# Allegro board BBB_CAPE_PCB_AN_V_1_1.brd
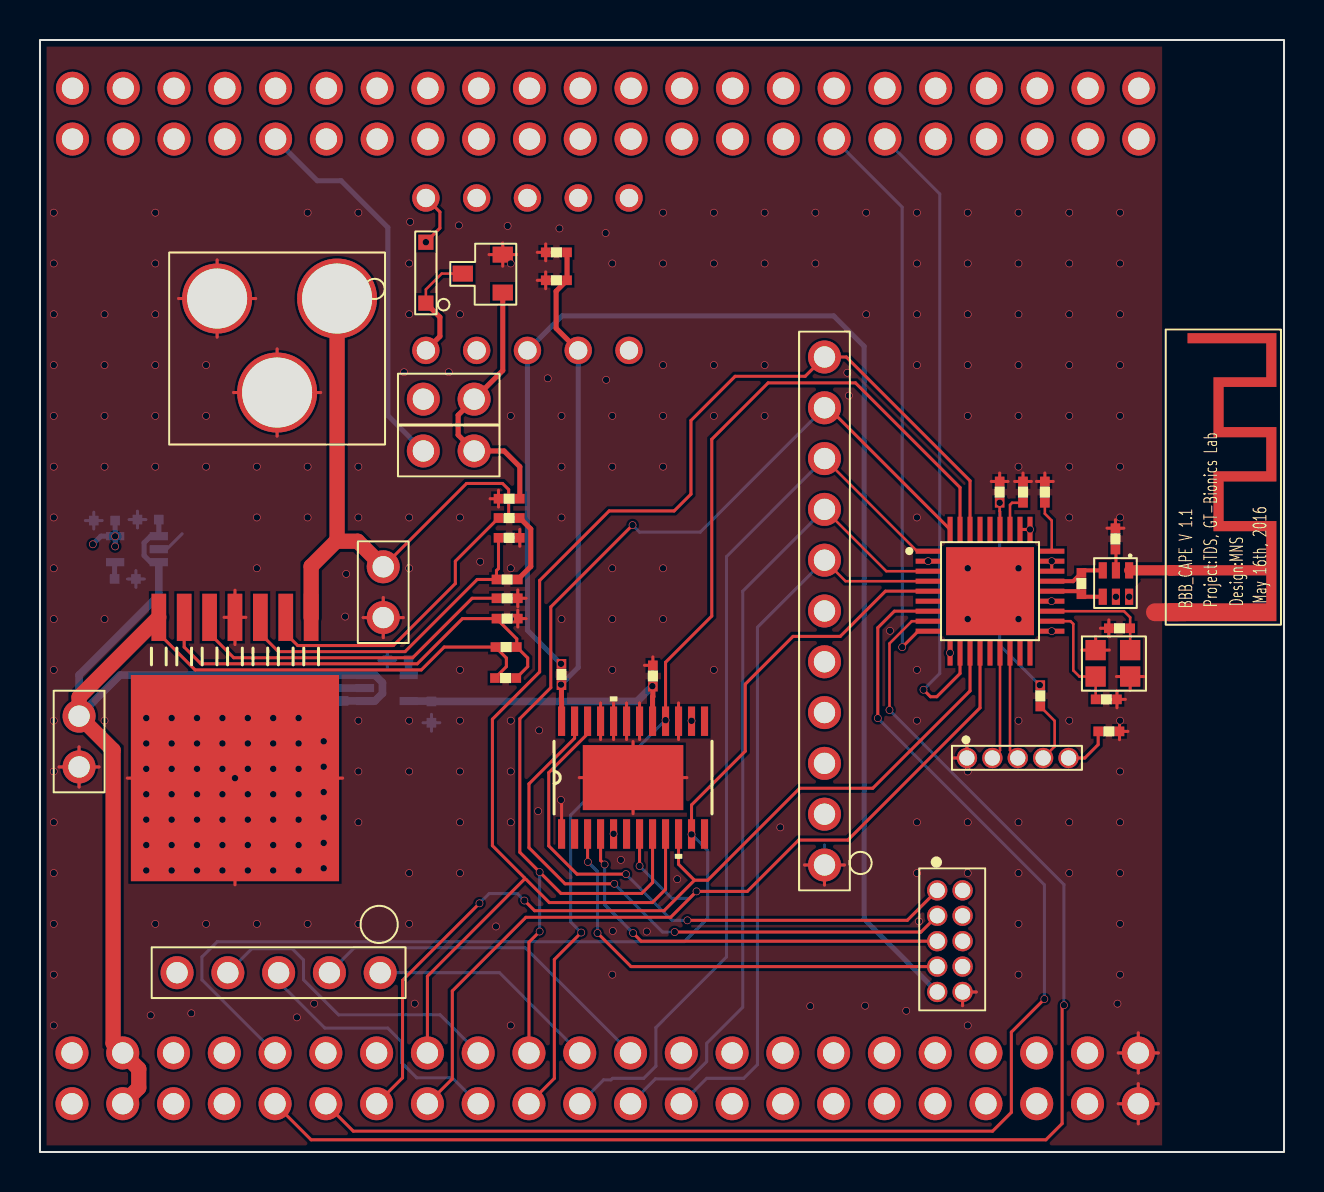
[diagram p0: board, top side]
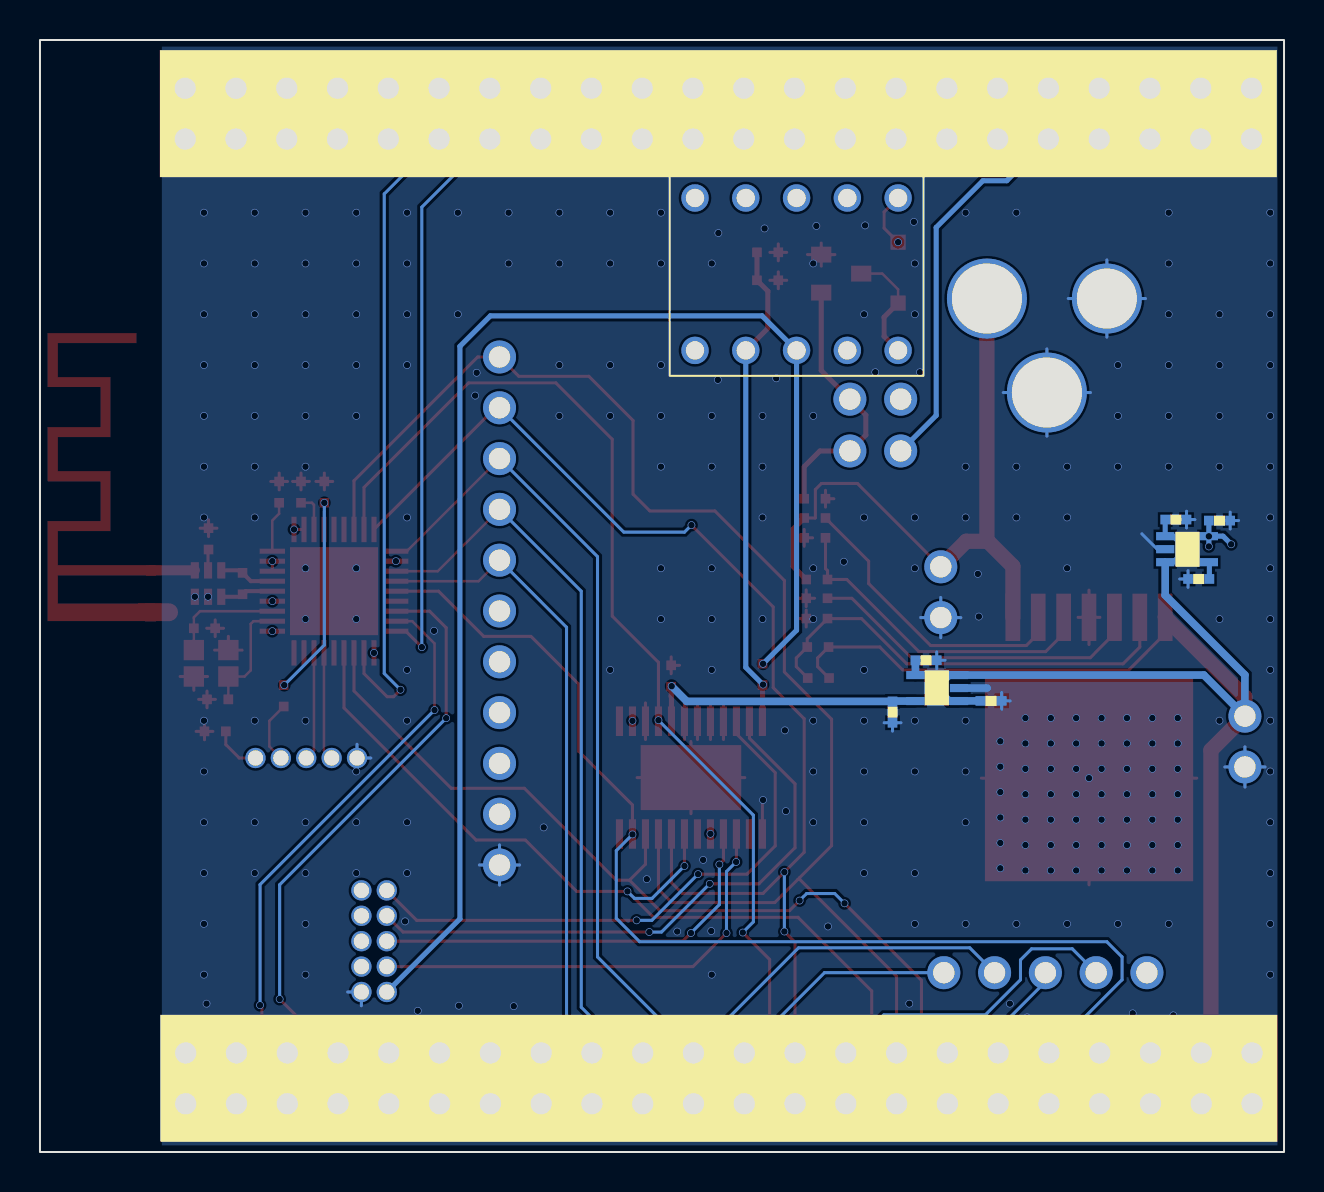
[diagram p1: board, bottom side, seen from below]

Outline 62.23 x 55.6 mm; copper layers: TOP, GND, MID, BOTTOM. Coordinates in mm from the lower left corner of the outline.
Outline path: rectangle 0,0 62.23,55.6

## Design rules (mm)
net group RF: nets RF+ RF-
nets with their own width: min track width 0.152; nets +12V FWD GND L N11227503 N11227519 N11227575 N11227777 N11228765 N11229371 N11229427 N11229455 N11229491 NCLR NLDAC NSYNC R RESET_N RVR SPI_MISO SPI_MOSI SPI_SCK VCC3V VCC5V

## Placement (name value [footprint] x y rotation side)
C1  10uF  [JUMPER2]  15.9 30.53 270 top
C2  0.022uF  [C0402]  24.33 28.37 180 top
C3  100uF  [JUMPER2]  3.23 17.98 90 top
C4  0.022uF  [C0402]  22.35 24.56 0 top
C6  1nF  [C0402]  48.69 32.03 90 top
C11  1uF  [C0402]  52.5 20.35 0 top
C12  1uF  [C0402]  49.86 32.03 90 top
C13  22pF  [C0402]  54.97 26.87 180 top
C14  22pF  [C0402]  52.37 21.95 0 top
C15  1uF  [C0402]  15.62 21.87 180 bottom
C41  10uF  [C0402]  26.8 45.67 180 top
C42  0.1uF  [C0402]  26.8 44.27 180 top
C45  100nF  [C0402]  29.97 24.76 270 top
C46  22pF  [C0402]  54.48 29.69 90 top
C47  1uF  [C0402]  20.27 22.96 270 bottom
C48  10nF  [C0402]  18.87 23.9 180 bottom
C49  1uF  [C0402]  4.19 30.89 180 bottom
C50  10nF  [C0402]  3.3 29.34 0 bottom
C51  1uF  [C0402]  6.38 30.94 180 bottom
D1  MBR0520L  [DIODED]  19.84 41.88 90 top
H9  851-87-005-10-001101  [H5X1_DEB]  48.92 19.71 0 top
H13  Header1X1  [ANT_W]  57.63 32.97 0 top
H14  HDISP  [DISP_HEADER]  40.51 13.08 90 top
J3  CON5  [H4X2]  44.88 13.08 270 top
L1  10nH  [L0402]  52.43 27.56 90 top
Q2  DMN5L06K  [MOS_DMN]  23.83 42.37 90 top
R2  100k  [R0402]  24.33 32.03 180 top
R3  5.62k  [R0402]  24.16 24.03 180 top
R4  1.07k  [R0402]  22.5 26.34 0 top
R5  56k  [R0402]  50.6 32.13 90 top
R57  100k  [R0402]  22.61 32.33 0 top
R58  0  [JUMPER2]  17.91 33.78 0 top
R59  0  [JUMPER2]  22.99 38.91 180 top
R60  2.7k  [R0402]  50.37 21.95 90 top
R61  0  [R0402]  26.42 23.01 90 top
RENB  11.8k  [R0402]  24.33 31.04 180 top
RENT  68.1k  [R0402]  22.5 28.3 0 top
U2  TPS71725  [TPS71730]  15.67 22.2 90 bottom
U6  PJack  [BARRELCON]  11.86 37.97 180 top
U7  1  [CC2510]  47.52 28.04 0 top
U9  P8  [CONNECT22X2]  56.24 55.09 270 bottom
U10  P9  [CONNECT22X2]  56.21 6.86 270 bottom
U11  Value  [AD5724]  29.67 18.72 90 top
U13  Value  [LMZ14203]  9.75 18.69 180 top
U14  relay  [MBR0520L]  18.03 48.97 0 bottom
U15  balunn  [BALUNN]  52.73 27.2 0 top
U16  TPS71733  [TPS71730]  6.53 31.14 270 bottom
U17  H_UART  [UART_HEADER]  18.29 10.24 180 top
Y1  26MHz  [CRYST_26M]  55.32 25.98 180 top

## Library data of the parts
C1-C4 C11-C14 C41 C42 C45 = C
C6 C15 C46 C48 C50 C51 = C: room: 1
C47 C49 = C: room: 2
D1 = 1N5814
H9 = H5X1_Debug
H13 = Header1X1_0: room: 1
H14 = HDISP
J3 = CON5_0
L1 = INDUCTOR
Q2 = DMN5L06K_0: room: 2
R2-R4 R57-R59 = R_0
R5 RENB RENT = R
R60 R61 = R: room: 1
U2 U16 = TPS71730_0: room: 1
U6 = PJack_0
U7 = cc2510f32rspr_1
U9 U10 = connect22x2
U11 = AD5724AREZ
U13 = LMZ14203_NDW_7
U14 = relay
U15 = balunn
U17 = H_UART
Y1 = CRYSTAL_2

## Footprints (pads in the part's own frame, mm; a bottom-side part is the same pattern mirrored in y, then rotated)
AD5724
  rect 1.473x0.356 smd: 1(-2.819,3.575) 2(-2.819,2.925) 3(-2.819,2.275) 4(-2.819,1.625) 5(-2.819,0.975) 6(-2.819,0.325) 7(-2.819,-0.325) 8(-2.819,-0.975) 9(-2.819,-1.625) 10(-2.819,-2.275) 11(-2.819,-2.925) 12(-2.819,-3.575) 13(2.819,-3.575) 14(2.819,-2.925) 15(2.819,-2.275) 16(2.819,-1.625) 17(2.819,-0.975) 18(2.819,-0.325) 19(2.819,0.325) 20(2.819,0.975) 21(2.819,1.625) 22(2.819,2.275) 23(2.819,2.925) 24(2.819,3.575)
  rect 3.251x5.029 smd: 25(0,0)
ANT_W
  rect 0.508x0.508 smd: 1(-0.94,-3.886)
  rect 0.889x0.889 smd: 2(-0.749,-5.982)
BALUNN
  rect 0.406x0.813 smd: 1(1.753,1.88) 2(1.092,1.88) 3(0.432,1.88) 4(0.432,0.559) 5(1.092,0.559) 6(1.753,0.559)
BARRELCON
  round 4 hole 3.5: 1(-3,-4.7) 3(0,0)
  round 3.5 hole 3: 2(3,-4.7)
C0402
  rect 0.483x0.483 smd: 1(0.432,0.686) 2(1.499,0.686)
CC2510
  rect 1.27x0.254 smd: 1(-3.086,2) 2(-3.086,1.5) 3(-3.086,1) 4(-3.086,0.5) 5(-3.086,0) 6(-3.086,-0.5) 7(-3.086,-1) 8(-3.086,-1.5) 9(-3.086,-2) 19(3.086,-2) 20(3.086,-1.5) 21(3.086,-1) 22(3.086,-0.5) 23(3.086,0) 24(3.086,0.5) 25(3.086,1) 26(3.086,1.5) 27(3.086,2)
  rect 0.254x1.27 smd: 10(-2,-3.086) 11(-1.5,-3.086) 12(-1,-3.086) 13(-0.5,-3.086) 14(0,-3.086) 15(0.5,-3.086) 16(1,-3.086) 17(1.5,-3.086) 18(2,-3.086) 28(2,3.086) 29(1.5,3.086) 30(1,3.086) 31(0.5,3.086) 32(0,3.086) 33(-0.5,3.086) 34(-1,3.086) 35(-1.5,3.086) 36(-2,3.086)
  rect 4.4x4.4 smd: 37(0,0)
CONNECT22X2
  round 1.651 hole 1.067: 1(4.445,54.61) 2(1.905,54.61) 3(4.445,52.07) 4(1.905,52.07) 5(4.445,49.53) 6(1.905,49.53) 7(4.445,46.99) 8(1.905,46.99) 9(4.445,44.45) 10(1.905,44.45) 11(4.445,41.91) 12(1.905,41.91) 13(4.445,39.37) 14(1.905,39.37) 15(4.445,36.83) 16(1.905,36.83) 17(4.445,34.29) 18(1.905,34.29) 19(4.445,31.75) 20(1.905,31.75) 21(4.445,29.21) 22(1.905,29.21) 23(4.445,26.67) 24(1.905,26.67) 25(4.445,24.13) 26(1.905,24.13) 27(4.445,21.59) 28(1.905,21.59) 29(4.445,19.05) 30(1.905,19.05) 31(4.445,16.51) 32(1.905,16.51) 33(4.445,13.97) 34(1.905,13.97) 35(4.445,11.43) 36(1.905,11.43) 37(4.445,8.89) 38(1.905,8.89) 39(4.445,6.35) 40(1.905,6.35) 41(4.445,3.81) 42(1.905,3.81) 43(4.445,1.27) 44(1.905,1.27)
CRYST_26M
  rect 1.016x1.016 smd: 1(0.787,0.889) 2(2.515,2.21) 3(2.515,0.889) 4(0.787,2.21)
DIODED
  rect 0.762x0.762 smd: 1(0.559,0.533) 2(3.607,0.533)
DISP_HEADER
  round 1.651 hole 1.067: 1(1.27,1.27) 2(3.81,1.27) 3(6.35,1.27) 4(8.89,1.27) 5(11.43,1.27) 6(13.97,1.27) 7(16.51,1.27) 8(19.05,1.27) 9(21.59,1.27) 10(24.13,1.27) 11(26.67,1.27)
H4X2
  round 1.016 hole 0.762: 1(0,0) 2(0,1.27) 3(1.27,0) 4(1.27,1.27) 5(2.54,0) 6(2.54,1.27) 7(3.81,0) 8(3.81,1.27) 9(5.08,0) 10(5.08,1.27)
H5X1_DEB
  round 1.016 hole 0.762: 1(-2.55,-0.01) 2(-1.28,-0.01) 3(-0.01,-0.01) 4(1.26,-0.01) 5(2.53,-0.01)
JUMPER2
  round 1.651 hole 1.067: 1(1.27,1.27) 2(3.81,1.27)
L0402
  rect 0.483x0.483 smd: 1(0.33,0.33) 2(1.397,0.33)
LMZ14203
  rect 0.737x2.362 smd: 1(-3.81,-8.039) 2(-2.54,-8.039) 3(-1.27,-8.039) 4(0,-8.039) 5(1.27,-8.039) 6(2.54,-8.039) 7(3.81,-8.039)
  rect 10.414x10.312 smd: 8(0,0)
MBR0520L
  round 1.372 hole 0.914: 1(1.27,1.27) 2(3.81,1.27) 3(6.35,1.27) 4(8.89,1.27) 5(11.43,1.27) 6(11.43,8.89) 7(8.89,8.89) 8(6.35,8.89) 9(3.81,8.89) 10(1.27,8.89)
MOS_DMN
  rect 0.8x1.016 smd: 1(0.605,0.676) 2(2.504,0.676) 3(1.554,2.676)
R0402
  rect 0.483x0.483 smd: 1(0.33,0.33) 2(1.397,0.33)
TPS71730
  rect 0.406x0.914 smd: 1(0.349,0.584) 2(0.999,0.584) 3(1.649,0.584) 4(1.649,2.769) 5(0.349,2.769)
UART_HEADER
  round 1.651 hole 1.067: 1(1.27,1.27) 2(3.81,1.27) 3(6.35,1.27) 4(8.89,1.27) 5(11.43,1.27)

## Nets
+12V: J3.9 R61.2 U14.8
AVDD: C41.1 C42.1 R61.1 U11.24(AVDD) U14.7
GND: C1.2 C2.1 C3.1 C6.2 C11.2 C12.2 C13.2 C14.2 C15.2 C41.2 C42.2 C45.1 C46.2 C47.2 C48.2 C49.2 C50.2 C51.2 H9.1(GND) H13.2 H14.1(GND) J3.10 Q2.2(S) R4.2 R5.2 R57.1 RENB.1 U2.2(GND) U6.2(GND) U6.3 U7.37(GND EXPOSED) U10.43 U10.44 U11.1(AVSS) U11.15(GND) U11.18(DAC_GND_1) U11.19(DAC_GND) U11.20(SIG_GND_1) U11.21(SIG_GND) U11.25(AVSS_1) U13.4(GND) U13.8 U15.5(GND2) U15.6(GND3) U16.2(GND) Y1.3(GND#3) Y1.4(GND#4)
VCC2P5V: C45.2 C47.1 U2.5(OUT) U11.17(REFIN)
VCC3V: C11.1 C49.1 D1.2(K) H9.5(VCC) H14.3(VCC3V) R59.2 U7.2(DVDD#2) U7.10(DVDD#10) U7.19(AVDD#19) U7.22(AVDD#22) U7.25(AVDD#25) U7.26(AVDD#26) U7.28(GUARD) U7.29(AVDD_DREG) U10.1 U10.2 U11.5(BIN/ 2SCOMP) U11.14(DVCC) U14.1 U16.5(OUT)
VCC5V: C3.2 C4.1 C15.1 C51.1 R3.2 U2.1(IN) U2.3(EN) U10.3 U10.4 U13.7(VOUT) U16.1(IN) U16.3(EN)
DC: H9.3(DC) U7.16(P2_2)
DD: H9.2(DD) U7.15(P2_1)
DIS_DC: H14.9(DC) U7.1(P1_2) U10.21
DIS_NCS: H14.7(OLEDCS) U7.4(P1_0) U10.25
DIS_RST: H14.8(RST) U7.3(P1_1) U10.23
FWD: J3.7 U11.3(VOUTA)
L: J3.3 U11.23(VOUTC)
NCLR: U7.5(P0_0) U10.10 U11.11(CLR)
NLDAC: U7.12(P0_6) U10.13 U11.10(LDAC)
NSYNC: U7.13(P0_7) U10.15 U11.7(SYNC)
R: J3.1 U11.22(VOUTD)
RELAYIN: R58.1 U9.9
RESET_N: C6.1 R60.2 U7.31(RESET_N)
RF+: L1.1 U7.23(RF_P) U15.4(BP2)
RF-: L1.2 U7.24(RF_N) U15.3(BP1)
RVR: J3.5 U11.4(VOUTB)
SPI_MISO: U7.35(P1_4) U10.19 U11.16(SDO)
SPI_MOSI: H14.11(MOSI) U7.34(P1_5) U10.16 U11.9(SDIN)
SPI_SCK: H14.10(SCK) U7.36(P1_3) U10.20 U11.8(SCLK)
UART0_CT: U7.9(P0_4) U9.31
UART0_RT: U7.11(P0_5) U9.33
UART0_RX: U7.7(P0_2) U10.11
UART0_TX: U7.8(P0_3) U10.9
UART1_CTS: U10.18 U17.4(UART_CTS)
UART1_RTS: U10.17 U17.3(UART_RTS)
UART1_RX: U10.24 U17.2(UART_RX)
UART1_TX: U10.22 U17.1(UART_TX)
N11227339: U10.30
N11227503: C1.1 R2.1 RENT.2 U6.1(HOT) U13.1(VIN)
N11227519: R2.2 U13.2(RON)
N11227575: RENB.2 RENT.1 U13.3(EN)
N11227777: C4.2 R3.1 R4.1 U13.6(FB)
N11228125: Q2.1(G) R57.2 R58.2 R59.1
N11228347: D1.1(A) Q2.3(D) U14.10
N11228619: H13.1 U15.1(UBP)
N11228669: C46.1 U15.2(GND1)
N11228765: C2.2 U13.5(SS)
N11229371: C12.1 U7.30(DCOUPL)
N11229427: R5.1 U7.27(RBIAS)
N11229455: C13.1 U7.21(XOSC_Q1) Y1.1
N11229491: C14.1 U7.20(XOSC_Q2) Y1.2
N11233960: H9.4(RST) R60.1
N11237432: C48.1 U2.4(NR/FB)
N11238368: C50.1 U16.4(NR/FB)
N11260771: U9.40
N11261102: U9.39

Pads without a net: H14 2 4 5 6; J3 2 4 6 8; U7 6 14 17 18 32 33; U9 1 2 3 4 5 6 7 8 10 11 12 13 14 15 16 17 18 19 20 21 22 23 24 25 26 27 28 29 30 32 34 35 36 37 38 41 42 43 44; U10 5 6 7 8 12 14 26 27 28 29 31 32 33 34 35 36 37 38 39 40 41 42; U11 2 6 12 13; U14 2 3 4 5 6 9; U17 5

## Via types
v1: diameter 0.381, hole 0.33, TOP to BOTTOM, 292 vias

## Routing (per net, layer and track width the routed paths; a pad name or vN(x,y) marks a point on that pad's centre or on a via; arc(x,y) is an arc through that point)
+12V: length 68.4
  BOTTOM w0.254: J3.9 41.22,11.66 41.22,40.28 39.7,41.81 26.11,41.81 U14.8 24.38,26.09 v1(26.06,24.41)
AVDD: length 24.5
  TOP w0.254: C41.1 C42.1 25.82,43.04 25.82,41.19 U14.7 ; U11.24 26.09,22.53 26.09,22.54 R61.1
  BOTTOM w0.254: v1(26.06,23.37) 26.92,24.23 U14.7
GND: length 199.2
  TOP w0.152: 53.94,4.95 U10.44 ; U10.44 54.94,3.95 ; U10.44 55.94,4.95 ; U10.44 54.94,5.96 ; Q2.2 23.15,45.45 ; Q2.2 22.46,44.87 ; Q2.2 23.84,44.87 ; Q2.2 23.15,44.29 ; C2.1 24.32,27.69 ; C2.1 23.9,28.11 ; C2.1 23.9,27.27 ; C2.1 23.48,27.69 ; R4.2 24.32,26.67 ; R4.2 23.9,27.09 ; R4.2 23.9,26.25 ; R4.2 23.48,26.67 ; 1.96,18.25 C3.1 ; C3.1 2.96,19.25 ; C3.1 0.95,19.25 ; C3.1 1.96,20.26 ; 46.15,7.31 J3.10 46.84,8 ; C41.2 25.3,45.4 ; C41.2 25.3,44.56 ; C41.2 25.72,44.98 ; C41.2 24.88,44.98 ; 22.94,32.24 R57.1 ; R57.1 22.94,33.08 ; R57.1 22.52,32.66 ; R5.2 50.27,33.95 ; R5.2 50.69,33.53 ; R5.2 49.85,33.53 ; R5.2 50.27,33.11 ; Y1.4 55.22,23.77 ; Y1.4 53.85,23.77 ; Y1.4 54.53,23.09 ; Y1.3 52.81,25.78 ; Y1.3 52.12,25.1 ; Y1.3 53.49,25.1 ; 28.04,20.62 U11.21 28.04,22.45 ; 6.93,42.67 U6.2 ; U6.2 8.86,40.74 ; U6.2 10.79,42.67 ; U6.2 8.86,44.6 ; 29.34,22.45 U11.19 29.34,20.62 ; H14.1 40.25,14.35 ; H14.1 39.24,13.35 ; H14.1 38.24,14.35 ; C45.1 30.66,24.75 ; C45.1 30.24,24.33 ; C45.1 30.66,23.91 ; v1(9.75,18.69) 15.14,18.69 ; v1(9.75,18.69) 4.37,18.69 ; v1(9.75,18.69) 9.75,13.36 ; 9.68,37.97 U6.3 ; U6.3 11.86,40.15 ; U6.3 14.04,37.97 ; U6.3 11.86,35.79 ; 54,20.61 C11.2 ; C11.2 54.42,21.03 ; C11.2 54,21.45 ; C11.2 53.58,21.03 ; v1(26.06,17.6) 26.09,17.57 U11.1 ; 9.21,26.73 U13.4 ; U13.4 9.75,25.37 ; U13.4 10.3,26.73 ; U13.4 9.75,28.09 ; U11.25 32.36,18.72 ; U11.25 29.67,20.52 ; U11.25 29.67,16.92 ; U11.25 26.97,18.72 ; C6.2 48.01,33.95 ; C6.2 48.43,33.53 ; C6.2 47.59,33.53 ; C6.2 48.01,33.11 ; 54.94,1.41 U10.43 ; U10.43 53.94,2.41 ; U10.43 54.94,3.42 ; U10.43 55.94,2.41 ; C46.2 54.22,31.19 ; C46.2 53.8,30.77 ; C46.2 53.38,31.19 ; C46.2 53.8,31.61 ; 16.17,26.72 C1.2 ; C1.2 17.17,25.72 ; C1.2 17.17,27.72 ; C1.2 18.17,26.72 ; H9.1 46.37,20.39 ; H9.1 46.37,19.01 ; H9.1 45.68,19.7 ; C14.2 53.87,23.05 ; C14.2 53.87,22.21 ; C14.2 53.45,22.63 ; C14.2 54.29,22.63 ; C12.2 49.17,33.95 ; C12.2 48.75,33.53 ; C12.2 49.17,33.11 ; C12.2 49.59,33.53 ; 28.69,20.62 U11.20 28.69,22.45 ; 53.47,26.19 53.47,26.61 ; 53.47,26.19 53.05,26.19 ; 53.47,26.19 53.89,26.19 ; 53.47,26.19 53.47,25.77 ; 29.99,22.45 U11.18 29.99,20.62 ; 31.94,20.62 U11.15 31.94,22.45 ; 25.3,43.17 C42.2 ; C42.2 24.88,43.59 ; C42.2 25.72,43.59 ; C42.2 25.3,44.01 ; 24,30.29 RENB.1 ; RENB.1 23.58,30.71 ; RENB.1 24,31.13
  TOP w0.889: H13.2 55.77,26.99
  GND w0.152: 46.15,7.31 J3.10 46.84,8 ; 1.96,18.38 C3.1 ; C3.1 1.96,20.13 ; C3.1 1.08,19.25 ; C3.1 2.83,19.25 ; 16.29,26.72 C1.2 ; C1.2 18.05,26.72 ; C1.2 17.17,27.6 ; C1.2 17.17,25.84 ; U10.43 55.82,2.41 ; U10.43 54.06,2.41 ; U10.43 54.94,1.54 ; U10.43 54.94,3.29 ; H14.1 39.24,15.23 ; H14.1 39.24,13.47 ; H14.1 40.12,14.35 ; H14.1 38.37,14.35 ; U6.3 14.04,37.97 ; U6.3 11.86,35.79 ; U6.3 11.86,40.15 ; U6.3 9.68,37.97 ; U10.44 55.82,4.95 ; U10.44 54.94,4.08 ; U10.44 54.94,5.83 ; U10.44 54.06,4.95 ; 46.37,19.01 H9.1 ; H9.1 46.37,20.39 ; H9.1 45.68,19.7 ; 55.68,43.21 55.83,43.36 ; U6.2 10.79,42.67 ; U6.2 8.86,40.74 ; U6.2 8.86,44.6 ; U6.2 6.93,42.67
  BOTTOM w0.152: U16.2 6.34,30.14 7.11,30.91 ; C48.2 17.37,25.01 ; C48.2 17.79,24.59 ; C48.2 17.37,24.17 ; C48.2 16.95,24.59 ; 9.68,37.97 U6.3 ; U6.3 14.04,37.97 ; U6.3 11.86,35.79 ; U6.3 11.86,40.15 ; U10.44 55.94,4.95 ; U10.44 53.94,4.95 ; U10.44 54.94,5.96 ; U10.44 54.94,3.95 ; 38.24,14.35 H14.1 ; H14.1 40.25,14.35 ; H14.1 39.24,15.35 ; H14.1 39.24,13.35 ; C15.2 14.54,22.56 ; C15.2 13.7,22.56 ; C15.2 14.12,22.97 ; C15.2 14.12,22.14 ; 46.37,19.01 H9.1 ; H9.1 45.68,19.7 ; H9.1 46.37,20.39 ; U10.43 54.94,3.42 ; U10.43 54.94,1.41 ; U10.43 55.94,2.41 ; U10.43 53.94,2.41 ; C3.1 1.96,20.26 ; C3.1 2.96,19.25 ; C3.1 0.95,19.25 ; C3.1 1.96,18.25 ; 2.27,31.57 C49.2 ; C49.2 2.69,31.15 ; C49.2 3.11,31.57 ; C49.2 2.69,31.99 ; C50.2 4.8,29.07 ; C50.2 4.8,28.23 ; C50.2 4.38,28.65 ; C50.2 5.22,28.65 ; U6.2 8.86,44.6 ; U6.2 8.86,40.74 ; U6.2 10.79,42.67 ; U6.2 6.93,42.67 ; C47.2 19.58,21.88 ; C47.2 19.16,21.46 ; C47.2 20,21.46 ; C47.2 19.58,21.04 ; C1.2 17.17,27.72 ; C1.2 17.17,25.72 ; C1.2 16.17,26.72 ; C1.2 18.17,26.72 ; C51.2 4.88,32.04 ; C51.2 4.88,31.2 ; C51.2 5.3,31.62 ; C51.2 4.46,31.62 ; 46.15,7.31 J3.10 46.84,8
  BOTTOM w0.381: U2.2 14.84,23.2
  vias: v1(0.69,46.97) v1(0.69,44.43) v1(0.69,41.89) v1(0.69,39.35) v1(0.69,36.81) v1(0.69,34.27) v1(0.69,31.73) v1(0.69,29.19) v1(0.69,26.65) v1(0.69,24.11) v1(0.69,21.57) v1(0.69,19.03) v1(0.69,16.49) v1(0.69,13.95) v1(0.69,11.41) v1(0.69,8.87) v1(0.69,6.33) v1(3.23,41.89) v1(3.23,39.35) v1(3.23,36.81) v1(3.23,34.27) v1(3.23,26.65) v1(3.23,21.57) v1(5.32,21.7) v1(5.32,20.43) v1(5.32,19.16) v1(5.32,17.89) v1(5.32,16.62) v1(5.32,15.35) v1(5.32,14.08) v1(5.54,6.83) v1(5.77,46.97) v1(5.77,44.43) v1(5.77,41.89) v1(5.77,39.35) v1(5.77,36.81) v1(5.77,34.27) v1(5.77,11.41) v1(6.59,21.7) v1(6.59,20.43) v1(6.59,19.16) v1(6.59,17.89) v1(6.59,16.62) v1(6.59,15.35) v1(6.59,14.08) v1(7.57,6.93) v1(7.86,21.7) v1(7.86,20.43) v1(7.86,19.16) v1(7.86,17.89) v1(7.86,16.62) v1(7.86,15.35) v1(7.86,14.08) v1(8.31,39.35) v1(8.31,36.81) v1(8.31,34.27) v1(8.31,11.41) v1(9.13,21.7) v1(9.13,20.43) v1(9.13,19.16) v1(9.13,17.89) v1(9.13,16.62) v1(9.13,15.35) v1(9.13,14.08) v1(10.4,21.7) v1(10.4,20.43) v1(10.4,19.16) v1(10.4,17.89) v1(10.4,16.62) v1(10.4,15.35) v1(10.4,14.08) v1(10.85,34.27) v1(10.85,31.73) v1(10.85,29.19) v1(10.85,11.41) v1(11.67,21.7) v1(11.67,20.43) v1(11.67,19.16) v1(11.67,17.89) v1(11.67,16.62) v1(11.67,15.35) v1(11.67,14.08) v1(12.85,6.73) v1(12.94,21.7) v1(12.94,20.43) v1(12.94,19.16) v1(12.94,17.89) v1(12.94,16.62) v1(12.94,15.35) v1(12.94,14.08) v1(13.39,46.97) v1(13.39,34.27) v1(13.39,31.73) v1(13.39,11.41) v1(13.72,7.42) v1(14.19,20.54) v1(14.19,19.27) v1(14.19,18) v1(14.19,16.73) v1(14.19,15.46) v1(14.19,14.19) v1(15.27,26.77) v1(15.32,28.91) v1(15.93,46.97) v1(15.93,34.27) v1(15.93,31.73) v1(15.93,21.57) v1(15.93,19.03) v1(15.93,16.49) v1(15.93,11.41) v1(18.21,38.99) v1(18.47,44.43) v1(18.47,41.89) v1(18.47,31.73) v1(18.47,29.19) v1(18.47,21.57) v1(18.47,19.03) v1(18.47,13.95) v1(18.47,11.41) v1(18.52,46.51) v1(18.75,7.42) v1(20.45,38.99) v1(20.96,46.33) v1(21.01,41.89) v1(21.01,31.73) v1(21.01,24.11) v1(21.01,21.57) v1(21.01,19.03) v1(21.01,16.49) v1(21.01,13.95) v1(22.02,29.51) v1(22.81,11.28) v1(23.39,46.3) v1(23.55,44.43) v1(23.55,36.81) v1(23.55,29.19) v1(23.55,26.65) v1(23.55,21.57) v1(23.55,19.03) v1(23.55,16.49) v1(23.55,6.33) v1(24.97,21.08) v1(24.92,17.04) v1(25.4,38.68) v1(25.98,46.18) v1(26.09,36.81) v1(26.09,34.27) v1(26.09,31.73) v1(26.09,26.65) v1(28.3,45.95) v1(28.32,38.61) v1(28.63,44.43) v1(28.63,36.81) v1(28.63,34.27) v1(28.63,29.19) v1(28.63,26.65) v1(28.63,24.11) v1(28.65,11.05) v1(28.63,8.87) v1(29.06,14.6) v1(30.35,11.02) v1(31.17,46.97) v1(31.17,44.43) v1(31.17,39.35) v1(31.17,36.81) v1(31.17,34.27) v1(31.17,29.19) v1(31.17,26.65) v1(31.88,13.64) v1(33.71,46.97) v1(33.71,44.43) v1(33.71,39.35) v1(33.71,36.81) v1(33.71,24.11) v1(36.25,46.97) v1(36.25,44.43) v1(36.25,39.35) v1(36.25,36.81) v1(37.03,16.23) v1(38.53,7.29) v1(38.79,46.97) v1(38.79,44.43) v1(40.39,38.96) v1(40.46,37.82) v1(41.28,7.32) v1(41.33,46.97) v1(41.33,41.89) v1(42.52,26.06) v1(43.33,7.06) v1(43.87,46.97) v1(43.87,44.43) v1(43.87,41.89) v1(43.87,39.35) v1(43.87,31.73) v1(43.87,24.11) v1(43.87,21.57) v1(43.87,16.49) v1(43.87,13.95) v1(43.97,11.53) v1(46.41,46.97) v1(46.41,44.43) v1(46.41,41.89) v1(46.41,39.35) v1(46.41,36.81) v1(46.41,29.19) v1(46.41,26.65) v1(46.41,19.03) v1(46.41,16.49) v1(46.41,13.95) v1(46.41,6.33) v1(48.95,46.97) v1(48.95,44.43) v1(48.95,41.89) v1(48.95,39.35) v1(48.95,36.81) v1(48.95,34.27) v1(48.95,29.19) v1(48.95,26.65) v1(48.95,21.57) v1(48.95,16.49) v1(48.95,13.95) v1(48.95,11.41) v1(48.95,8.87) v1(51.49,46.97) v1(51.49,44.43) v1(51.49,41.89) v1(51.49,39.35) v1(51.49,36.81) v1(51.49,34.27) v1(51.49,31.73) v1(51.49,21.57) v1(51.49,16.49) v1(51.49,13.95) v1(53.82,27.76) v1(53.9,7.42) v1(54.03,46.97) v1(54.03,44.43) v1(54.03,41.89) v1(54.03,39.35) v1(54.03,36.81) v1(54.03,34.27) v1(54.03,31.73) v1(54.03,21.57) v1(54.03,19.03) v1(54.03,16.49) v1(54.03,13.95) v1(54.03,11.41) v1(54.03,8.87) v1(54.48,27.76)
VCC2P5V: length 14.2
  TOP w0.254: U11.17 30.64,22.76 30.66,22.77 C45.2
  BOTTOM w0.381: v1(30.63,23.29) 29.87,22.53 C47.1 19.56,22.55 U2.5
VCC3V: length 24.9
  TOP w0.152: U7.22 v1(50.6,27.54) ; H9.5 52.26,19.7 52.93,20.37 C11.1 ; U7.2 v1(44.43,29.54) ; v1(19.3,45.49) 20,46.19 20,47 U14.1 ; v1(49.52,31.13) U7.29 ; U11.14 v1(32.59,21.56) ; U11.5 v1(28.69,15.91) ; v1(50.61,29.54) U7.25
  MID w0.152: 51.45,19.01 H9.5 ; H9.5 52.14,19.7 ; H9.5 51.45,20.39 ; U10.1 2.48,2.41 ; U10.1 0.72,2.41 ; U10.1 1.6,1.54 ; U10.1 1.6,3.29 ; 19.18,36.77 R59.2 ; R59.2 20.05,37.64 ; R59.2 19.18,38.52 ; R59.2 18.3,37.64 ; U10.2 1.6,5.83 ; U10.2 0.72,4.95 ; U10.2 1.6,4.08 ; U10.2 2.48,4.95 ; H14.3 40.12,19.43 ; H14.3 38.37,19.43 ; H14.3 39.24,18.55 ; H14.3 39.24,20.31
  BOTTOM w0.254: U16.5 C49.1 ; U16.5 3.05,30.79 v1(2.64,30.39) ; U16.5 v1(3.76,30.78) v1(3.76,30.28)
  vias: v1(45.52,24.96) v1(50.61,26.04)
VCC5V: length 79.8
  TOP w0.152: U13.7 5.94,25.92 7.76,24.1 19.08,24.1 20.22,25.25 22.78,25.25 23.33,24.7 23.33,24.27 R3.2
  TOP w0.762: U10.3 4.94,3.21 4.94,4.15 U10.4 3.66,5.44 3.66,20.09 C3.2 1.96,22.75 U13.7
  BOTTOM w0.254: C51.1 U16.1 5.54,30.79 5.21,30.46 5.21,29.82 5.54,29.49 U16.3
  BOTTOM w0.381: C15.1 16.25,22.56 U2.1 16.75,22.55 17.13,22.93 17.13,23.47 16.75,23.85 U2.3 4.01,23.85 C3.2 1.96,23.85 5.94,27.84 U16.3
DC: length 5.4
  TOP w0.127: U7.16 48.52,20.09 H9.3
DD: length 5.4
  TOP w0.127: U7.15 48.02,20.08 H9.2
DIS_DC: length 45.6
  TOP w0.127: H14.9 43.87,30.04 U7.1
  BOTTOM w0.152: U10.21 28.19,3.61 28.56,3.61 28.64,3.68 30.2,3.68 30.81,4.29 30.81,6.22 34.34,9.75 34.34,29.77 H14.9
DIS_NCS: length 36.9
  TOP w0.127: H14.7 40.29,28.54 U7.4
  BOTTOM w0.152: H14.7 35.89,26.24 35.89,4.37 35.2,3.68 33.35,3.68 U10.25
DIS_RST: length 41.2
  TOP w0.127: H14.8 42.33,29.04 U7.3
  BOTTOM w0.152: U10.23 30.78,3.66 32.49,3.66 33.35,4.52 33.35,5.44 35.15,7.24 35.15,28.04 H14.8
FWD: length 22.8
  TOP w0.152: U11.3 27.39,14.52 v1(27.41,14.5) ; J3.7 29.57,9.27 v1(27.89,10.95)
  BOTTOM w0.152: v1(27.89,10.95) 27.89,14.02 v1(27.41,14.5)
L: length 29.8
  TOP w0.152: v1(31.75,11) 44.07,11 J3.3 ; v1(28.73,13.41) 26.26,13.41 24.46,15.21 24.46,18.41 26.74,20.69 U11.23
  BOTTOM w0.152: v1(31.75,11) 31.14,11 v1(28.73,13.41)
NCLR: length 56.7
  TOP w0.152: U7.5 42.29,28.04 40.03,25.78 37.67,25.78 35.28,23.39 35.28,20.04 32.59,17.35 U11.11 v1(32.59,15.88)
  BOTTOM w0.152: v1(32.59,15.88) 33.4,15.07 33.4,11.68 32.23,10.52 8.86,10.52 8.1,9.75 8.1,8.61 U10.10
NLDAC: length 46.3
  TOP w0.152: U10.13 18.14,3.71 18.14,8.59 v1(21.98,12.43) ; 32.74,13.59 31.94,14.39 U11.10 ; 32.74,13.59 31.22,12.06 24.74,12.06 v1(24.23,12.57) ; 32.74,13.59 33.4,13.59 38,18.19 41.66,18.19 46.52,23.05 U7.12
  BOTTOM w0.152: v1(21.98,12.43) 22.47,12.92 23.88,12.92 v1(24.23,12.57)
NSYNC: length 46.4
  TOP w0.152: U7.13 47.02,22.21 40.41,15.6 37.95,15.6 35.38,13.03 v1(32.84,13.03) 31.55,11.73 24.31,11.73 20.62,8.05 20.62,3.66 U10.15 ; U11.7 v1(29.99,14.3)
  BOTTOM w0.152: v1(29.99,14.3) 31.61,12.68 32.49,12.68 v1(32.84,13.03)
R: length 28.6
  TOP w0.152: J3.1 43.38,11.58 v1(32.38,11.58) ; v1(29.31,13.89) 26.86,13.89 25.45,15.3 25.45,18.97 27.39,20.91 U11.22
  BOTTOM w0.152: v1(29.31,13.89) 31.62,11.58 v1(32.38,11.58)
RELAYIN: length 19.4
  BOTTOM w0.254: 19.18,35.05 17.4,36.83 17.4,46.23 15.06,48.56 13.87,48.56 U9.9
RESET_N: length 11.3
  TOP w0.127: U7.31 48.02,32.01 48.01,32.03 v1(48.01,32.46)
  BOTTOM w0.152: v1(50.01,23.34) 48.01,25.35 v1(48.01,32.46)
RF+: length 2.7
  TOP w0.203: U7.23 51.94,28.04 L1.1 52.22,27.76 U15.4
RF-: length 2.8
  TOP w0.203: U7.24 51.68,28.54 L1.2 52.22,29.08 U15.3
RVR: length 21
  TOP w0.152: v1(28.24,14.38) 28.04,14.58 U11.4 ; J3.5 30.07,10.54 v1(29.67,10.95)
  BOTTOM w0.152: v1(29.67,10.95) 28.24,12.37 v1(28.24,14.38)
SPI_MISO: length 55.4
  TOP w0.152: v1(27.08,10.97) 25.73,9.63 25.73,3.68 U10.19 ; U7.35 46.02,33.22 40.79,38.46 36.42,38.46 33.6,35.64 33.6,26.8 31.29,24.49 U11.16
  BOTTOM w0.152: v1(31.29,21.59) 26.54,16.84 26.54,11.51 v1(27.08,10.97)
SPI_MOSI: length 71.2
  TOP w0.152: 24.23,13.64 24.23,13.72 22.63,15.32 22.63,21.64 24.99,24 24.99,28.57 28.47,32.05 31.72,32.05 32.56,32.89 32.56,36.58 34.77,38.79 38.28,38.79 H14.11 40.34,39.75 46.52,33.56 U7.34 ; 24.23,13.64 19.38,8.79 U10.16 ; 24.23,13.64 24.31,13.64 25.48,12.47 30.63,12.47 31.29,13.13 U11.9
SPI_SCK: length 59.2
  TOP w0.152: v1(24.99,11.02) 24.46,10.49 U10.20 ; H14.10 39.44,37.21 U7.36 ; v1(29.64,31.34) 25.55,27.25 25.55,23.22 24,21.67 24,14.99 v1(24.99,14) 26.06,12.93 30.1,12.93 30.64,13.47 U11.8
  BOTTOM w0.152: v1(24.99,11.02) v1(24.99,14) ; H14.10 33.03,30.99 29.99,30.99 v1(29.64,31.34)
UART0_CT: length 28.5
  TOP w0.152: U7.9 43.93,26.04 v1(43.13,25.24)
  BOTTOM w0.152: U9.31 43.13,47.24 v1(43.13,25.24)
UART0_RT: length 32.5
  TOP w0.152: v1(44.2,23.11) 44.55,22.76 44.86,22.76 46.02,23.93 U7.11
  BOTTOM w0.152: v1(44.2,23.11) 45.01,23.93 45.01,47.9 U9.33
UART0_RX: length 66.5
  TOP w0.152: v1(50.24,7.65) 48.59,5.99 48.59,1.98 47.65,1.04 15.67,1.04 U10.11 ; v1(41.91,21.69) 41.91,26.21 42.74,27.04 U7.7
  BOTTOM w0.152: v1(50.24,7.65) 50.24,13.36 v1(41.91,21.69)
UART0_TX: length 70.5
  TOP w0.127: U7.8 43.61,26.54 42.49,25.42 v1(42.49,22.1)
  TOP w0.152: v1(51.22,7.34) 51.13,7.25 51.13,1.42 50.32,0.61 13.56,0.61 U10.9
  BOTTOM w0.152: v1(51.22,7.34) 51.22,13.37 v1(42.49,22.1)
UART1_CTS: length 15.8
  BOTTOM w0.152: U10.18 20.02,6.86 14.94,6.86 13.18,8.61 13.18,9.6 12.62,10.16 10.59,10.16 U17.4
UART1_RTS: length 13.6
  BOTTOM w0.152: U17.3 11.94,8.51 14.25,6.2 17.4,6.2 18.08,5.51 18.08,4.47 18.85,3.71 20.62,3.71 U10.17
UART1_RX: length 17.8
  BOTTOM w0.152: U17.2 15.72,10.21 24.28,10.21 U10.24
UART1_TX: length 11.6
  BOTTOM w0.152: U10.22 22.99,8.97 U17.1
N11227503: length 33
  TOP w0.152: C1.1 21.34,33.43 23.14,33.43 23.44,33.12 23.44,31.71 23.46,31.7 R2.1
  TOP w0.254: RENT.2 24.55,29.27 24.55,31.15 R2.1
  TOP w0.762: C1.1 15.89,30.54 14.82,30.54 ; 14.82,30.54 14.86,30.58 U6.1 ; 14.82,30.54 13.56,29.29 U13.1
N11227519: length 15
  TOP w0.152: R2.2 20.78,29.54 20.78,28.42 17.68,25.32 12.89,25.32 12.29,25.92 U13.2
N11227575: length 16.6
  TOP w0.152: U13.3 11.02,25.92 11.93,25.02 18.26,25.02 21.87,28.63 RENT.1 22.83,29.07 22.94,29.17 RENB.2
N11227777: length 22.2
  TOP w0.152: R3.1 24.4,24.27 24.4,24.7 23.85,25.25 23.85,25.65 R4.1 21.13,26.67 18.87,24.41 8.05,24.41 7.21,25.25 U13.6
N11228125: length 13.4
  TOP w0.254: Q2.1 23.15,39.07 R59.1 20.92,36.84 20.92,35.85 R58.2 23.22,35.05 24,34.26 24,32.66
N11228347: length 5.8
  TOP w0.127: Q2.3 20.1,43.92 19.3,43.13 D1.1
  TOP w0.254: D1.1 20,41.74 20,40.78 U14.10
N11228619: length 2.2
  TOP w0.508: H13.1 U15.1
N11228669: length 1.1
  TOP w0.152: C46.1 53.82,30.1 U15.2
N11228765: length 16.9
  TOP w0.152: C2.2 21.62,27.69 18.64,24.71 9.69,24.71 8.48,25.92 U13.5
N11229371: length 1.9
  TOP w0.127: U7.30 48.52,32.36 48.63,32.46 C12.1
N11229427: length 2.6
  TOP w0.127: R5.1 50.27,31.92 50.61,31.57 U7.27
N11229455: length 5.7
  TOP w0.127: U7.21 54.23,27.04 54.53,26.73 C13.1 Y1.1
N11229491: length 5.8
  TOP w0.127: U7.20 51.55,26.54 51.69,26.4 51.69,24.08 51.99,23.77 Y1.2 C14.1
N11233960: length 3.1
  TOP w0.127: R60.1 50.76,21.56 50.76,20.28 H9.4
N11237432: length 0.7
  BOTTOM w0.381: U2.4 C48.1
N11238368: length 0.9
  BOTTOM w0.254: C50.1 3.73,29.47 U16.4

## Copper pours and planes (outline as drawn; the poured copper is in the pictures)
GND on TOP: 0.33,0.33 0.33,55.27 56.13,55.27 56.13,0.33 ; 8 cut-outs
GND on BOTTOM: 0.33,55.27 0.33,0.33 56.13,0.33 56.13,55.27 ; 4 cut-outs
GND on GND: 0.33,0.33 0.33,55.27 56.13,55.27 56.13,0.33
VCC3V on MID: 0.33,0.33 0.33,55.27 56.13,55.27 56.13,0.33
N11228619 on TOP (solid shape): 61.85,38.25 59.21,38.25 59.21,36.25 61.85,36.25 61.85,33.53 59.21,33.53 59.21,31.55 61.85,31.55 61.85,26.54 56.44,26.54 56.44,27.43 61.34,27.43 61.34,28.83 56.44,28.83 56.44,29.34 61.34,29.34 61.34,31.04 58.7,31.04 58.7,34.04 61.34,34.04 61.34,35.74 58.7,35.74 58.7,38.73 61.34,38.73 61.34,40.44 57.4,40.44 57.4,40.94 61.85,40.94

## Text on the board
Ref Des/Silkscreen Top: BBB_CAPE V 1.1 | Project:TDS, GT-Bionics Lab | Design:MNS | May 16th, 2016
